# Altium PCB POT.PcbDoc
Units mm, origin at the board's own origin, x right, y up, seen from the top; angles counter-clockwise.
Board outline 67.96 x 67.96 mm, 2 copper layers (Top Layer, Bottom Layer); 3 components, 0 nets, 21 pads, 0 vias.
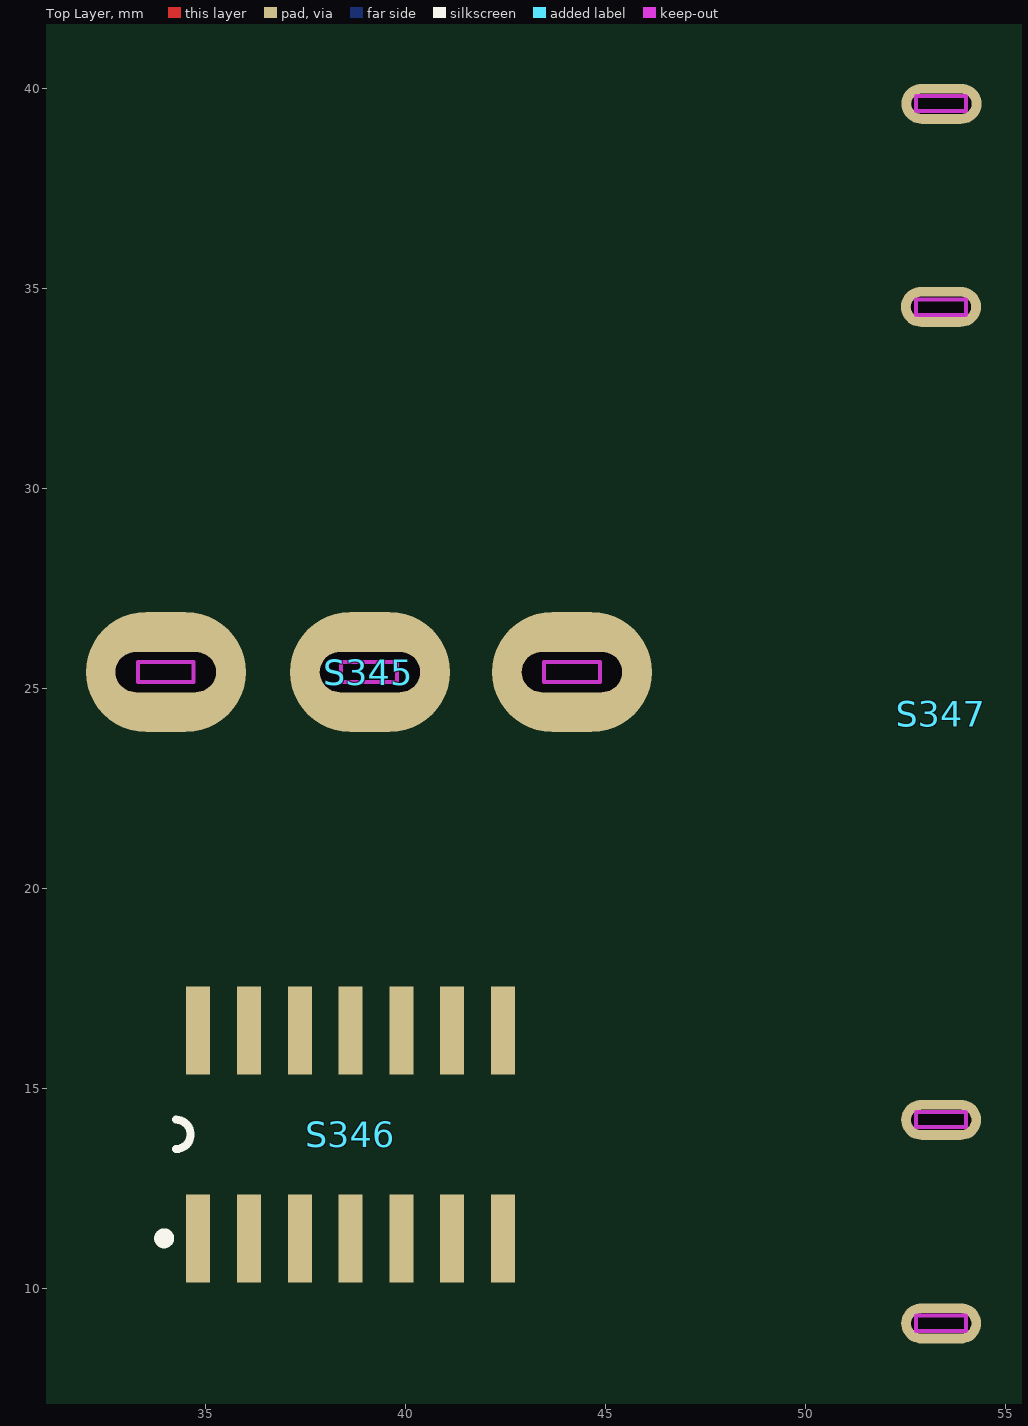
[diagram p0: Top Layer view]
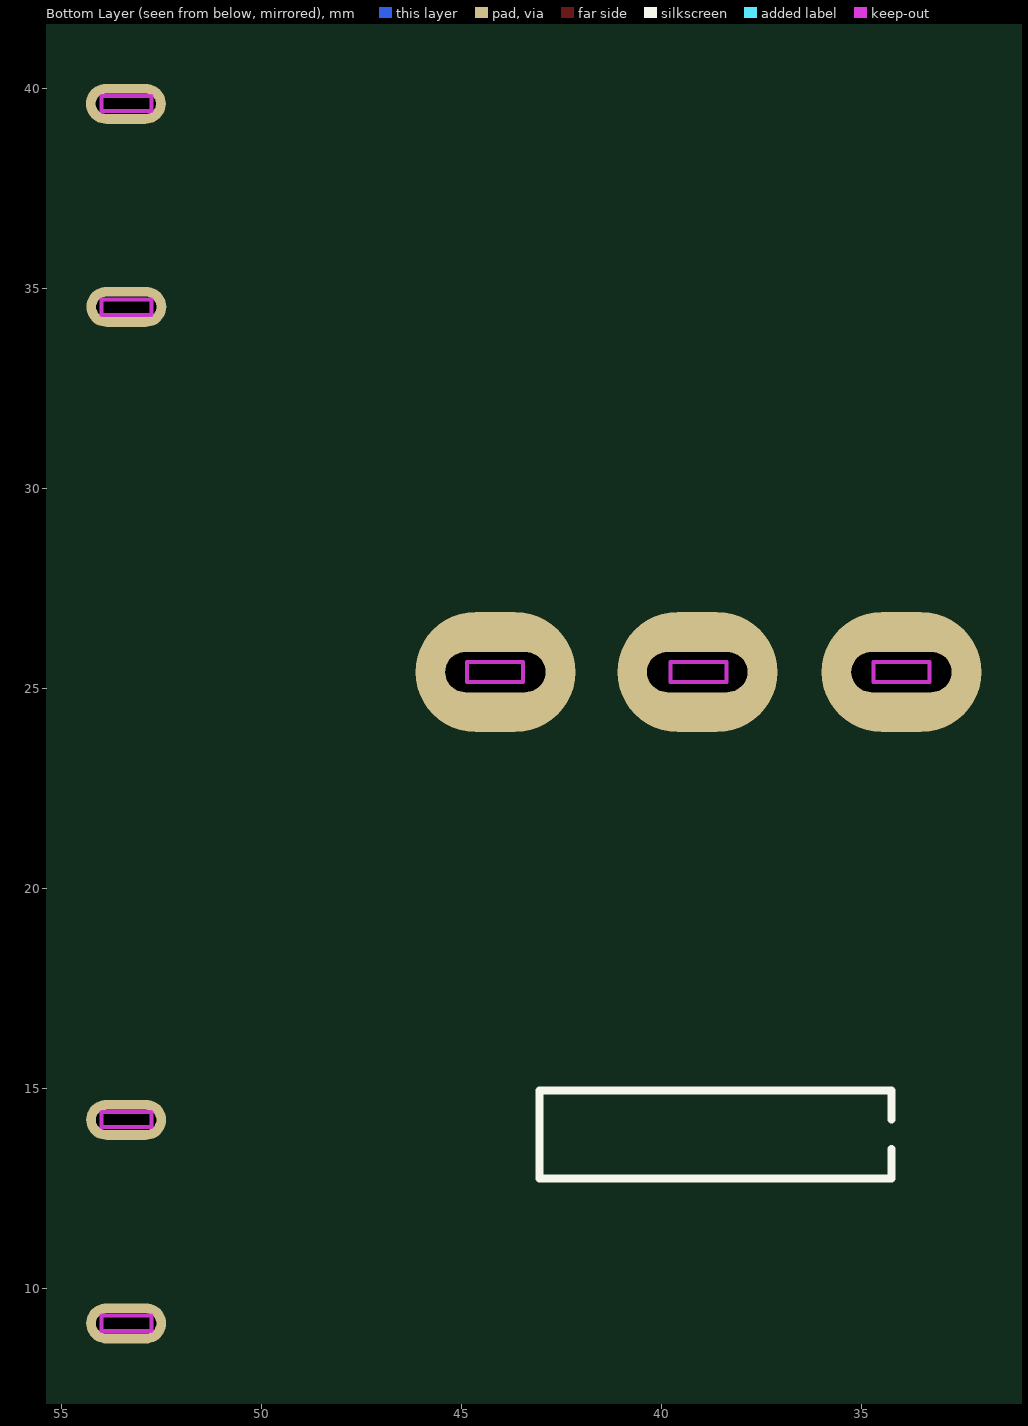
[diagram p1: Bottom Layer view, seen from below]

## Layer stack, top to bottom
Top Layer: signal copper 0.0356
Dielectric: dielectric 0.32, FR-4, Dk 4.8
Bottom Layer: signal copper 0.0356

## Board outline
3.217,35.537 ccw(c37.199,35.537) 37.199,1.555 ccw(c37.199,35.537) 71.181,35.537 ccw(c37.199,35.537) 37.199,69.519 ccw(c37.199,35.537)

## Design rules (kind name [scope] priority, off if disabled: settings)
Clearance [All] p1: gap=0.254
PolygonConnect [All] p1: connectstyle=Relief reliefconductorwidth=0.254 reliefentries=4 polygonreliefangle="90 Angle"
RoutingVias [All] p1: holewidth=0.711 width=1.27 viastyle="Through Hole" minholewidth=0.711 minwidth=1.27 maxholewidth=0.711 maxwidth=1.27
SilkscreenOverComponentPads [All] p1: minsilkscreentomaskgap=0.254
SolderMaskExpansion [All] p1: expansion=0.102
TestPointUsage [All] p1: valid=0 allowmultiple=FALSE
Testpoint [All] p1: side=15 testpointundercomponent=TRUE minsize=1.016 maxsize=2.54 preferedsize=1.524 minholesize=0 maxholesize=1.016 preferedholesize=0.813 testpointgrid=0.025 style=1023 order=0123456789
Width [All] p1: maxlimit=0.254 minlimit=0.254 preferedwidth=0.254
23 further rules are at their usual default settings.

## Components (designator, comment, footprint, x,y, rotation, side; value= is the part's Value field where it differs from the comment)
S345 "Comment" POT-大可调 39.116,25.4 r0 top
S346 "Comment" SOP-14 38.608,13.716 r90 top
S347 "Comment" FUSE 53.34,24.892 r270 top

## Footprints (in the part's own frame and the unit in brackets; to place one, negate y for a bottom-side part, rotate by r counter-clockwise, add the part's x,y. Pads: shape width x height; smd on the part's side, far side on the other; paste and mask are expansions set on the pad)
FUSE [mm]
  oval 1x2 hole 0.5 slot 1.5 at 90 deg: 1(-14.714,0.063) 1(-9.637,0.051) 1(10.688,0.056) 1(15.776,0.056)
  Keep-Out Layer lines w0.1: 15.966,-0.573 15.581,-0.573 15.581,0.677 15.966,0.677 15.966,0.052 15.966,-0.573 ; 10.871,-0.573 10.486,-0.573 10.486,0.052 10.486,0.677 10.871,0.677 10.871,0.052 10.871,-0.573 ; -9.434,-0.573 -9.819,-0.573 -9.819,0.052 -9.819,0.677 -9.434,0.677 -9.434,0.052 -9.434,-0.573 ; -14.529,-0.573 -14.914,-0.573 -14.914,0.052 -14.914,0.677 -14.529,0.677 -14.529,-0.573
  body extent -14.85,-2.85 16.03,3.05, height 8.84
POT-大可调 [mm]
  oval 4x3 hole 1 slot 2.5 at 0 deg: 1(-5.104,0) 2(0,0) 3(5.05,0)
  Keep-Out Layer lines w0.1: -0.724,-0.25 0.673,-0.25 0.673,0.25 -0.724,0.25 -0.724,-0.228 ; -5.804,-0.25 -4.407,-0.25 -4.407,0.25 -5.804,0.25 -5.804,-0.25 ; 4.356,-0.25 5.753,-0.25 5.753,0.25 4.356,0.25 4.356,-0.25
  body extent -7.85,-20.43 7.9,5.13, height 20.62
SOP-14 [mm]
  rect 2.2x0.6 smd: 1(-2.473,3.787) 2(-2.473,2.517) 3(-2.473,1.247) 4(-2.473,-0.023) 5(-2.473,-1.293) 6(-2.473,-2.563) 7(-2.473,-3.833) 8(2.727,-3.833) 9(2.727,-2.563) 10(2.727,-1.293) 11(2.727,-0.023) 12(2.727,1.247) 13(2.727,2.517) 14(2.727,3.787)
  silkscreen extent -2.6,3.98 0.49,4.76, body extent -3.04,-4.4 3.16,4.3, height 1.61

## Nets (pads, with @x,y where several pads share a name; then routed paths per layer and width w, separated by ;. In a path a pad name is that pad's centre, name@x,y a point inside that pad or via, vN(x,y) a via of type N, cw(c..) or ccw(c..) an arc to the next point about the centre after c; other vN are vias at no path point)
pads on no net: S345.1 S345.2 S345.3 S346.1 S346.2 S346.3 S346.4 S346.5 S346.6 S346.7 S346.8 S346.9 S346.10 S346.11 S346.12 S346.13 S346.14 S347.1

## Keep-outs
Keep-Out Layer:
  circle w0.254: c37.199,35.537 r33.982